# EAGLE board r4c_pcb_v1 (EAGLE 5.10)
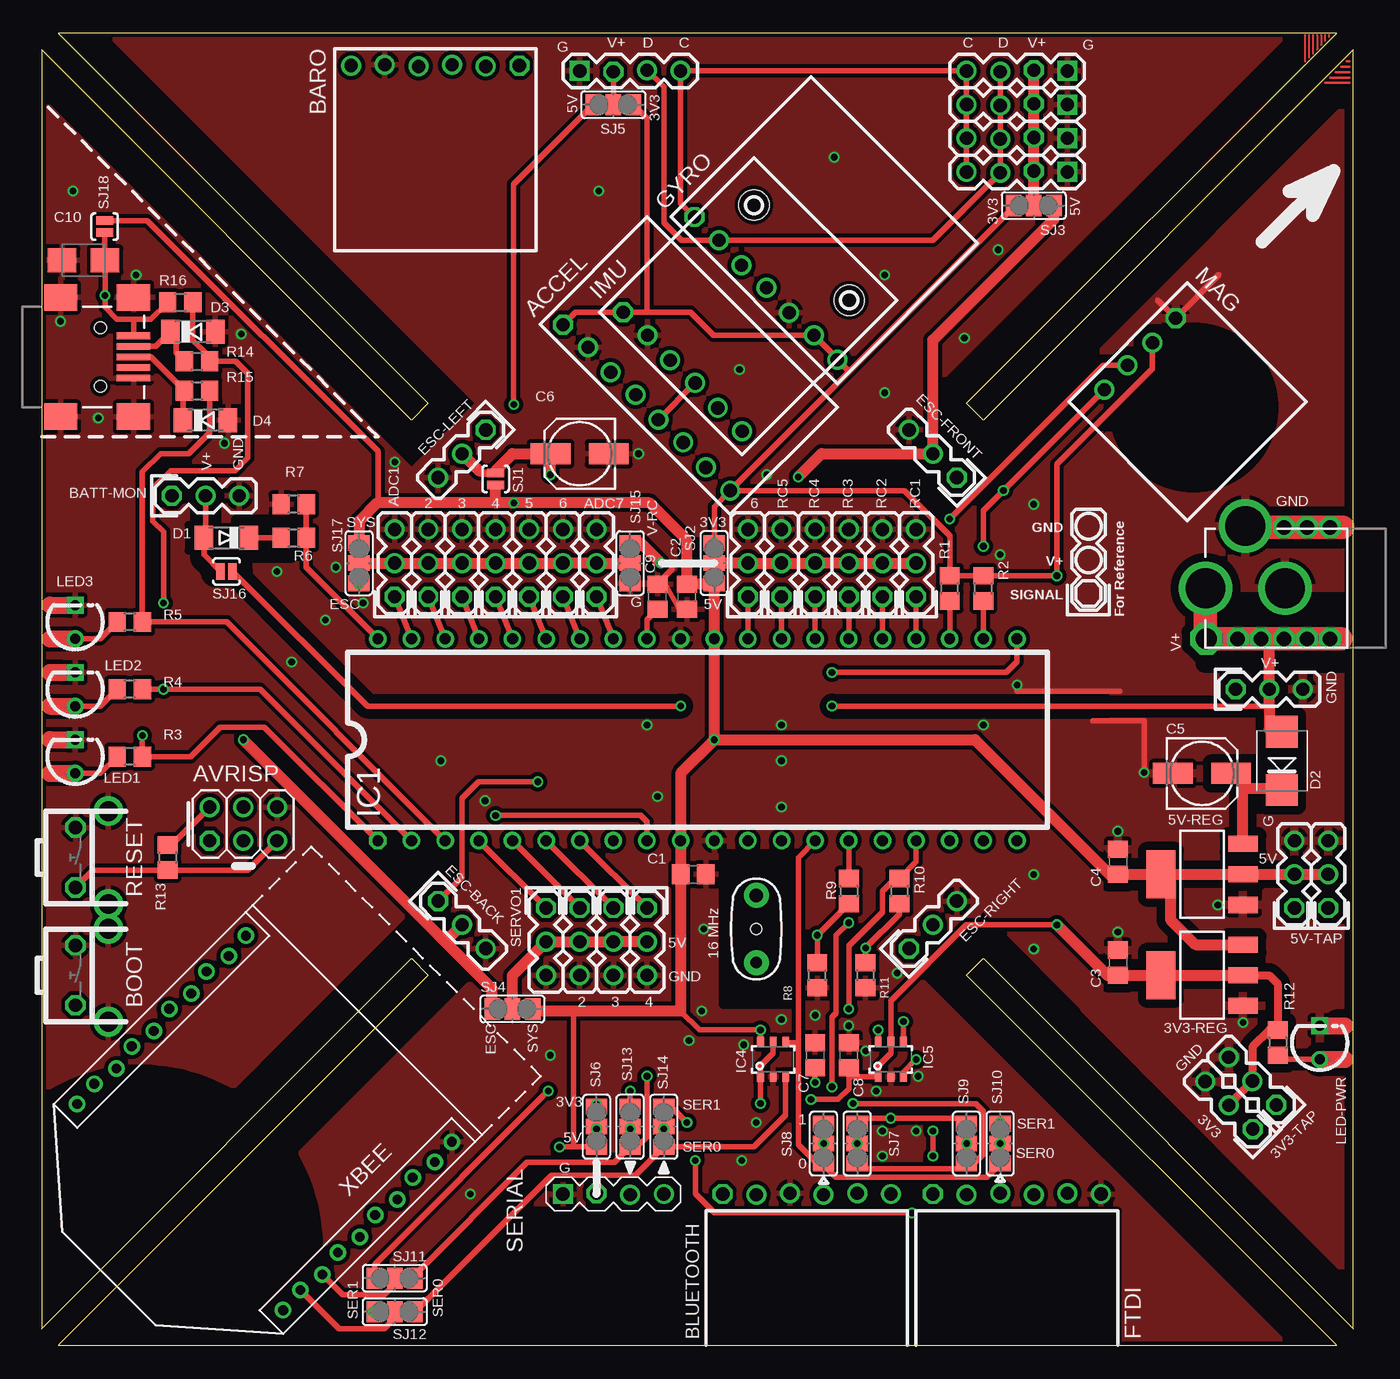
[diagram p0: board, top side]
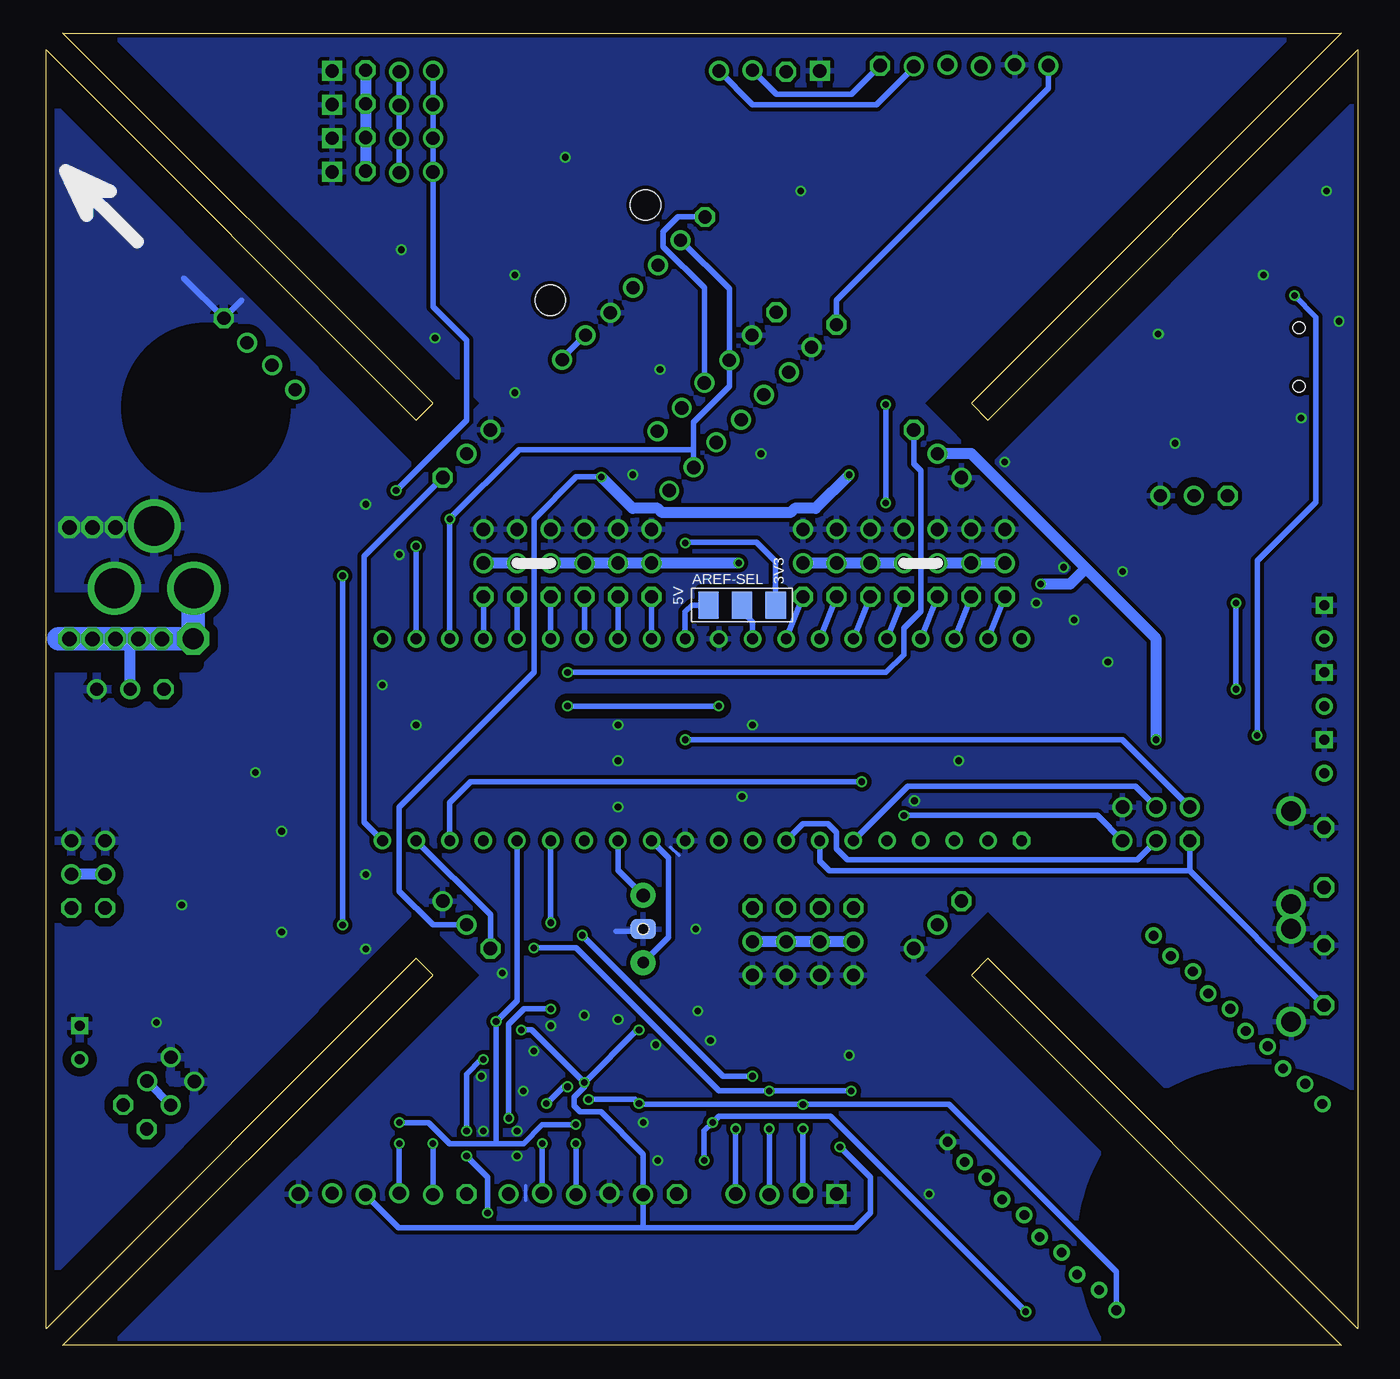
[diagram p1: board, bottom side, seen from below]

Size 99.06 x 99.06 mm. Coordinates in mm from the lower left corner, seen from the top.
Outline: 27.94,29.21 29.21,27.94 1.27,0 97.79,0 69.85,27.94 71.12,29.21 99.06,1.27 99.06,97.79 71.12,69.85 69.85,71.12 97.79,99.06 1.27,99.06 29.21,71.12 27.94,69.85 0,97.79 0,1.27 27.94,29.21
Copper layers (1*16): Top 0.035mm / dielectric 1.5mm / Bottom 0.035mm
Design rules "Fusion_eagle_rule_v1.1_TentedVias2 *": minimum track width 6mil, minimum drill 0.5mm, track to track 6mil, track to pad 6mil, pad to pad 6mil, via to via 6mil, smd to smd 0mil, copper to edge 10mil, drill to drill 10mil, minimum pad ring 10mil, minimum via ring 6mil, stop-mask expansion 2mil, vias tented up to drill 25mil, thermal gap 12mil
tKeepout: area 36.8,0 to 49.5,10.2
tRestrict: area 36.8,0 to 49.5,10.2; area 92.4,43.2 to 94.9,45.1; area 13,60.2 to 14.9,61.8; area 87.8,51.4 to 99.1,56.2; area 12.2,63.9 to 12.6,64.4; area 14.6,59.4 to 18.9,62.4; area 11.1,60 to 11.7,61.9; 13 lines
bRestrict: area 87.8,51.4 to 99.1,56.2; area 12.2,63.9 to 12.6,64.4; 1 lines

## Footprints (pad centres in the part's own frame; a part is rotated, then mirrored left to right if it is on the bottom)
SOT223 = smd 1.219 x 2.235: 1 -2.311,-3.099; 2 0,-3.099; 3 2.311,-3.099 | smd 3.6 x 2.2: 4 0,3.099
SERVO-3PIN = drill 1 octagon: 1 0,-2.54 | drill 1 round: 2 0,0; 3 0,2.54
BMA180-BOB = drill 1 octagon: 1 -8.89,-0.064 | drill 1 round: 2 -6.35,0.064; 3 -3.81,-0.064; 4 -1.27,0.064; 5 1.27,-0.064; 6 3.81,0.064; 7 6.35,-0.064; 8 8.89,0
SJ-FERRITE-BEAD = smd 1.524 x 2.032: 1 -2.54,0; 2 0,0; 3 2.54,0
2X3-NS = drill 1 octagon: 1 -2.54,-1.27 | drill 1 round: 2 -2.54,1.27; 3 0,-1.27; 4 0,1.27; 5 2.54,-1.27; 6 2.54,1.27
BMP085-BOB = drill 1 octagon: 1 -6.35,0 | drill 1 round: 2 -3.81,0.064; 3 -1.27,-0.064; 4 1.27,0.064; 5 3.81,-0.064; 6 6.35,0
BLUESMIRF-CONN = drill 1 octagon: 1 -6.35,0 | drill 1 round: 2 -3.81,-0.064; 3 -1.27,0.064; 4 1.27,-0.064; 5 3.81,0.064; 6 6.35,0
B3F-31XX = drill 1.016 octagon: 1 -2.261,-1.245; 2 2.261,-1.245 | drill 1.499 pad 2.159 round: S@3 -3.505,1.245; S@4 3.505,1.245
C0805 = smd 1.3 x 1.5: 1 -0.95,0; 2 0.95,0
153CLV-0505 = smd 3 x 1.6: + 2.2,0; - -2.2,0
B/3528-21W = smd 2.15 x 1.8: + 1.625,0; - -1.625,0
MINIMELF = smd 1.4 x 1.8: A 1.7,0; C -1.7,0
SMB = smd 2.4 x 2.4: A 2.2,0; C -2.2,0
SOD80C = smd 1.4 x 1.8: A 1.7,0; C -1.7,0
FTDI-CABLE-EDGE = drill 1 octagon: 1 -6.35,0 | drill 1 round: 2 -3.81,-0.064; 3 -1.27,0.064; 4 1.27,-0.064; 5 3.81,0.064; 6 6.35,0
ITG-3200-BOB = drill 1 octagon: 1 -7.62,0 | drill 1 round: 2 -5.08,0.064; 3 -2.54,-0.064; 4 0,0.064; 5 2.54,-0.064; 6 5.08,0.064; 7 7.62,0
DIL40 = drill 0.813 octagon: 1 -24.13,-7.62 | drill 0.813 round: 2 -21.59,-7.62; 3 -19.05,-7.62; 4 -16.51,-7.62; 5 -13.97,-7.62; 6 -11.43,-7.62; 7 -8.89,-7.62; 8 -6.35,-7.62; 9 -3.81,-7.62; 10 -1.27,-7.62; 11 1.27,-7.62; 12 3.81,-7.62; 13 6.35,-7.62; 14 8.89,-7.62; 15 11.43,-7.62; 16 13.97,-7.62; 17 16.51,-7.62; 18 19.05,-7.62; 19 21.59,-7.62; 20 24.13,-7.62; 21 24.13,7.62; 22 21.59,7.62; 23 19.05,7.62; 24 16.51,7.62; 25 13.97,7.62; 26 11.43,7.62; 27 8.89,7.62; 28 6.35,7.62; 29 3.81,7.62; 30 1.27,7.62; 31 -1.27,7.62; 32 -3.81,7.62; 33 -6.35,7.62; 34 -8.89,7.62; 35 -11.43,7.62; 36 -13.97,7.62; 37 -16.51,7.62; 38 -19.05,7.62; 39 -21.59,7.62; 40 -24.13,7.62
SOT-23-6 = smd 0.51 x 0.8: 1 -0.95,-1.3; 2 0,-1.3; 3 0.95,-1.3; 4 0.95,1.3; 5 0,1.3; 6 -0.95,1.3
6DOF_IMU = drill 1 octagon: 1 0,-6.35 | drill 1 round: 2 -0.064,-3.81; 3 0.064,-1.27; 4 -0.064,1.27; 5 0.064,3.81; 6 0,6.35 | hole 2.286: -12.7,5.08; -12.7,-5.08
POWER_JACK_PTH = drill 2.997 round: GND 0,7.7; GNDBREAK 4.7,10.7; PWR 0,13.7
LED3MM = drill 0.762 pad 1.27 round: A -1.27,0 | drill 0.762 pad 1.27 square: K 1.27,0
HMC5843-BOB = drill 1 octagon: 1 -3.81,0 | drill 1 round: 2 -1.27,0.064; 3 1.27,-0.064; 4 3.81,0
R0805 = smd 1.3 x 1.5: 1 -0.95,0; 2 0.95,0
SERIAL-CONN = drill 1 square: 1 -3.81,0 | drill 1 octagon: 2 -1.27,0.064 | drill 1 round: 3 1.27,-0.064; 4 3.81,0
SJ_2S-NO = smd 0.635 x 1.27: 1 -0.45,0; 2 0.45,0
SJ_2 = smd 1.168 x 1.6: 1 -1.524,0; 2 0,0; 3 1.524,0
USB-MINIB = smd 2.5 x 0.5: D+ 2.5,0; D- 2.5,0.8; GND 2.5,-1.6; ID 2.5,-0.8; VBUS 2.5,1.6 | smd 2.5 x 2: GND@1 -3,-4.5; GND@2 -3,4.5; GND@3 2.5,4.5; GND@4 2.5,-4.5 | hole 0.9: 0,2.2; 0,-2.2
I2C-GROUP = drill 1 square: 1 -3.81,0 | drill 1 octagon: 2 -1.27,-0.064 | drill 1 round: 3 1.27,0.064; 4 3.81,0
XBEE-1_LOCK = drill 0.737 round: 1 -10.987,20; 2 -10.822,18; 3 -11.178,16; 4 -10.822,14; 5 -11.178,12; 6 -10.822,10; 7 -11.178,8; 8 -10.822,6; 9 -11.178,4; 10 -11.013,2; 11 10.987,2; 12 10.822,4; 13 11.178,6; 14 10.822,8; 15 11.178,10; 16 10.822,12; 17 11.178,14; 18 10.822,16; 19 11.178,18; 20 11.013,20
RESONATOR-PTH = drill 1.016 pad 1.88 round: 1 -2.54,0 | smd 1.524 x 1.905 bottom: 2 0,0 | drill 0.864 pad 1.88 round: 3 2.54,0 | hole 0.825: 0,0

## Placement (x,y rotation side)
3V3-REG  [SOT223]  87.63,27.94 90 top
3V3-TAP  [SERVO-3PIN]  91.44,19.95 45 top
3V3-TAP1  [SERVO-3PIN]  89.66,18.13 45 top
5V-REG  [SOT223]  87.63,35.56 90 top
5V-TAP  [SERVO-3PIN]  94.61,35.56 0 top
5V-TAP1  [SERVO-3PIN]  97.16,35.56 0 top
ACCEL  BMA180-BOB  [BMA180-BOB]  45.72,70.81 315 top
ADC1  [SERVO-3PIN]  26.67,59.05 0 top
ADC2  [SERVO-3PIN]  29.21,59.05 0 top
ADC3  [SERVO-3PIN]  31.75,59.05 0 top
ADC4  [SERVO-3PIN]  34.29,59.05 0 top
ADC5  [SERVO-3PIN]  36.83,59.05 0 top
ADC6  [SERVO-3PIN]  39.37,59.05 0 top
ADC7  [SERVO-3PIN]  41.91,59.05 0 top
AREF-SEL  [SJ-FERRITE-BEAD]  46.51,55.88 180 bottom
AVRISP  [2X3-NS]  15.24,39.37 0 top
BARO  BMP085-BOB  [BMP085-BOB]  29.74,96.61 180 top
BATT  [SERVO-3PIN]  92.71,49.53 270 top
BATT-MON  [SERVO-3PIN]  12.38,64.14 270 top
BLUETOOTH  [BLUESMIRF-CONN]  57.78,11.43 0 top
BOOT  [B3F-31XX]  3.81,27.94 270 top
C1  0.1u  [C0805]  49.21,35.56 0 top
C2  0.1u  [C0805]  48.74,56.52 270 top
C3  1u  [C0805]  81.28,28.89 90 top
C4  1u  [C0805]  81.28,36.51 90 top
C5  33u  [153CLV-0505]  87.63,43.18 0 top
C6  33u  [153CLV-0505]  40.64,67.31 180 top
C7  0.1u  [C0805]  58.42,21.91 90 top
C8  0.1u  [C0805]  60.96,21.91 90 top
C9  0.1u  [C0805]  46.51,56.52 90 top
C10  4u7  [B/3528-21W]  3.17,81.92 0 top
D1  [MINIMELF]  13.97,60.96 180 top
D2  [SMB]  93.66,44.13 90 top
D3  3V6  [SOD80C]  11.43,76.52 0 top
D4  3V6  [SOD80C]  12.38,69.85 0 top
ESC-BACK  [SERVO-3PIN]  31.75,31.75 225 top
ESC-FRONT  [SERVO-3PIN]  67.31,67.31 45 top
ESC-LEFT  [SERVO-3PIN]  31.75,67.31 135 top
ESC-RIGHT  [SERVO-3PIN]  67.31,31.75 315 top
FTDI  [FTDI-CABLE-EDGE]  73.66,11.43 0 top
GYRO  IDG-3200-BOB  [ITG-3200-BOB]  54.7,79.79 315 top
IC1  ATMEGA644PA-20PU  [DIL40]  49.53,45.72 0 top
IC4  TXB0101 SOT-23-6  [SOT-23-6]  55.24,21.59 0 top
IC5  TXB0101 SOT-23-6  [SOT-23-6]  64.14,21.59 0 top
IMU  6DOF_IMU  [6DOF_IMU]  48.41,73.51 225 top
J1  BATTERY  [POWER_JACK_PTH]  101.6,57.15 90 top
LED1  [LED3MM]  2.54,44.45 90 top
LED2  [LED3MM]  2.54,49.53 90 top
LED3  [LED3MM]  2.54,54.61 90 top
LED-PWR  [LED3MM]  96.52,22.86 90 top
MAG  HMC5843-BOB  [HMC5843-BOB]  82.95,74.84 225 top
R1  4K7  [R0805]  68.58,57.15 90 top
R2  4K7  [R0805]  71.12,57.15 90 top
R3  1K  [R0805]  6.67,44.45 180 top
R4  1K  [R0805]  6.67,49.53 180 top
R5  1K  [R0805]  6.67,54.61 180 top
R6  15K  [R0805]  19.05,60.96 0 top
R7  7K5  [R0805]  19.05,63.5 180 top
R8  10K  [R0805]  58.58,27.94 90 top
R9  4K7  [R0805]  60.96,34.29 270 top
R10  4K7  [R0805]  64.77,34.29 270 top
R11  10K  [R0805]  62.23,27.94 90 top
R12  1K  [R0805]  93.34,22.86 270 top
R13  10K  [R0805]  9.53,36.83 270 top
R14  68R  [R0805]  11.75,74.3 0 top
R15  68R  [R0805]  11.75,72.07 0 top
R16  2K2  [R0805]  10.48,78.74 0 top
RC1  [SERVO-3PIN]  66.04,59.05 0 top
RC2  [SERVO-3PIN]  63.5,59.05 0 top
RC3  [SERVO-3PIN]  60.96,59.05 0 top
RC4  [SERVO-3PIN]  58.42,59.05 0 top
RC5  [SERVO-3PIN]  55.88,59.05 0 top
RC6  [SERVO-3PIN]  53.34,59.05 0 top
RESET  [B3F-31XX]  3.81,36.83 270 top
SERIAL  SERIAL  [SERIAL-CONN]  43.18,11.43 0 top
SERVO1  [SERVO-3PIN]  38.1,30.48 180 top
SERVO2  [SERVO-3PIN]  40.64,30.48 180 top
SERVO3  [SERVO-3PIN]  43.18,30.48 180 top
SERVO4  [SERVO-3PIN]  45.72,30.48 180 top
SJ1  SOLDERJUMPERNO  [SJ_2S-NO]  34.29,65.41 270 top
SJ2  [SJ_2]  50.8,59.05 90 top
SJ3  [SJ_2]  74.93,86.04 180 top
SJ4  [SJ_2]  35.56,25.4 0 top
SJ5  [SJ_2]  43.18,93.66 0 top
SJ6  [SJ_2]  41.91,16.51 90 top
SJ7  [SJ_2]  61.59,15.24 90 top
SJ8  [SJ_2]  59.05,15.24 90 top
SJ9  [SJ_2]  69.85,15.24 90 top
SJ10  [SJ_2]  72.39,15.24 90 top
SJ11  [SJ_2]  26.67,5.08 180 top
SJ12  [SJ_2]  26.67,2.54 180 top
SJ13  [SJ_2]  44.45,16.51 90 top
SJ14  [SJ_2]  46.99,16.51 90 top
SJ15  [SJ_2]  44.45,59.05 270 top
SJ16  SOLDERJUMPERNO  [SJ_2S-NO]  13.97,58.42 0 top
SJ17  [SJ_2]  23.97,59.05 270 top
SJ18  SOLDERJUMPERNO  [SJ_2S-NO]  4.76,84.45 90 top
U$2  [SERVO-3PIN-REFERENCE]  79.06,59.29 90 top
U$3  [ARROR-DIR-REFERENCE]  93.98,85.09 315 top
U$4  [ARROR-DIR-REFERENCE]  93.98,85.09 45 bottom
U$5  USB-MINIB-WSHIELD  [USB-MINIB]  4.45,74.61 0 top
X14  I2C-GROUP  [I2C-GROUP]  73.66,96.2 180 top
X15  I2C-GROUP  [I2C-GROUP]  73.66,93.66 180 top
X16  I2C-GROUP  [I2C-GROUP]  73.66,91.12 180 top
X17  I2C-GROUP  [I2C-GROUP]  73.66,88.58 180 top
X18  I2C  [I2C-GROUP]  44.45,96.2 0 top
XBEE  [XBEE-1_LOCK]  24.62,24.57 135 top
Y1  16 MHz  [RESONATOR-PTH]  53.98,31.43 270 top

## Library data of the parts
3V3-REG 3V3-TAP 3V3-TAP1 5V-REG 5V-TAP 5V-TAP1 ACCEL ADC1-ADC7 AREF-SEL AVRISP BARO BATT BATT-MON BLUETOOTH BOOT ESC-BACK ESC-FRONT ESC-LEFT ESC-RIGHT FTDI GYRO IC1 IC4 IC5 IMU J1 LED1-LED3 LED-PWR MAG RC1-RC6 RESET SERIAL SERVO1-SERVO4 SJ1-SJ18 U$2-U$5 X14-X18 XBEE Y1 = aq_pcb_v2
C1-C10 R1-R16 = rcl
D1-D4 = diode

## Nets
5V-ESC: C6.+ ESC-BACK.2 ESC-FRONT.2 ESC-LEFT.2 ESC-RIGHT.2 SJ1.1 SJ3.1 SJ4.1 SJ17.3
+3V3: 3V3-REG.2 3V3-REG.4 3V3-TAP1.2 3V3-TAP.2 ACCEL.1 ACCEL.8 AREF-SEL.1 BARO.6 C3.1 C8.1 GYRO.6 GYRO.7 IC4.1 IC4.5 IC5.1 IC5.5 IMU.1 MAG.2 R1.2 R2.2 R12.1 SJ2.3 SJ3.3 SJ5.3 SJ6.3 XBEE.1
+5V: 3V3-REG.3 5V-REG.2 5V-REG.4 5V-TAP1.2 5V-TAP.2 AREF-SEL.3 AVRISP.2 BLUETOOTH.2 C1.1 C2.1 C4.1 C7.1 FTDI.4 IC1.10 IC1.30 IC4.6 IC5.6 R13.1 SJ1.2 SJ2.1 SJ4.3 SJ5.1 SJ6.1 SJ17.1 SJ18.2
+12V: BATT.2 D2.A J1.PWR SJ16.2
ADC1: ADC1.1 IC1.39
ADC2: ADC2.1 IC1.38
ADC3: ADC3.1 IC1.37
ADC4: ADC4.1 IC1.36
ADC5: ADC5.1 IC1.35
ADC6: ADC6.1 IC1.34
ADC7: ADC7.1 IC1.33
ESC-BACK: ESC-BACK.1 IC1.18
ESC-FRONT: ESC-FRONT.1 IC1.20
ESC-LEFT: ESC-LEFT.1 IC1.21
ESC-RIGHT: ESC-RIGHT.1 IC1.19
GND: 3V3-REG.1 3V3-TAP1.3 3V3-TAP.3 5V-REG.1 5V-TAP1.3 5V-TAP.3 ACCEL.2 ADC1.3 ADC2.3 ADC3.3 ADC4.3 ADC5.3 ADC6.3 ADC7.3 AVRISP.6 BARO.5 BATT-MON.3 BATT.3 BLUETOOTH.3 BOOT.1 BOOT.S@3 BOOT.S@4 C1.2 C2.2 C3.2 C4.2 C5.- C6.- C7.2 C8.2 C9.2 C10.- D3.A D4.A ESC-BACK.3 ESC-FRONT.3 ESC-LEFT.3 ESC-RIGHT.3 FTDI.6 GYRO.5 IC1.11 IC1.31 IC4.2 IC5.2 IMU.2 J1.GND J1.GNDBREAK LED1.K LED2.K LED3.K LED-PWR.K MAG.1 R7.2 R8.1 R11.1 RC1.3 RC2.3 RC3.3 RC4.3 RC5.3 RC6.3 RESET.1 RESET.S@3 RESET.S@4 SERIAL.1 SERVO1.3 SERVO2.3 SERVO3.3 SERVO4.3 SJ15.3 U$5.GND U$5.GND@1 U$5.GND@2 U$5.GND@3 U$5.GND@4 X14.1 X15.1 X16.1 X17.1 X18.1 XBEE.10 Y1.2
MISO: AVRISP.1 BOOT.2 IC1.7 SERVO4.1
MOSI: AVRISP.4 IC1.6 SERVO3.1
N$1: IC1.12 Y1.3
N$2: IC1.13 Y1.1
N$3: LED3.A R5.2
N$4: LED2.A R4.2
N$5: LED1.A R3.2
N$6: SJ3.2 X14.2 X15.2 X16.2 X17.2
N$8: RC1.2 RC2.2 RC3.2 RC4.2 RC5.2 RC6.2 SJ2.2 SJ15.1
N$11: IC1.40 R6.2 R7.1
N$12: SJ5.2 X18.2
N$13: D1.C R6.1
N$14: BATT-MON.2 D1.A SJ16.1
N$15: SERIAL.2 SJ6.2
N$16: 5V-REG.3 C5.+ D2.C
N$17: BLUETOOTH.5 SJ7.2
N$18: BLUETOOTH.4 SJ8.2
N$19: FTDI.2 SJ9.2
N$20: SERVO1.2 SERVO2.2 SERVO3.2 SERVO4.2 SJ4.2
N$21: FTDI.3 SJ10.2
N$22: SJ12.2 XBEE.2
N$23: SJ11.2 XBEE.3
N$24: LED-PWR.A R12.2
N$25: AREF-SEL.2 C9.1 IC1.32
N$31: SERIAL.3 SJ13.2
N$32: SERIAL.4 SJ14.2
N$34: ADC1.2 ADC2.2 ADC3.2 ADC4.2 ADC5.2 ADC6.2 ADC7.2 SJ15.2 SJ17.2
N$42: D3.C R14.1 U$5.D-
N$43: D4.C R15.1 U$5.D+
RC-IN-1: IC1.24 RC1.1
RC-IN-2: IC1.25 RC2.1
RC-IN-3: IC1.26 RC3.1
RC-IN-4: IC1.27 RC4.1
RC-IN-5: IC1.28 RC5.1
RC-IN-6: IC1.29 RC6.1
RESET: AVRISP.5 IC1.9 R13.2 RESET.2
RX0-HV: IC1.14 IC4.4 SJ8.1 SJ10.1
RX0-LV: IC4.3 SJ12.1 SJ14.1
RX1-HV: IC1.16 IC5.4 SJ8.3 SJ10.3
RX1-LV: IC5.3 SJ12.3 SJ14.3
SCK: AVRISP.3 IC1.8
SCL: ACCEL.5 BARO.2 GYRO.1 IC1.22 IMU.4 MAG.4 R2.1 X14.4 X15.4 X16.4 X17.4 X18.4
SDA: ACCEL.7 BARO.1 GYRO.2 IC1.23 IMU.3 MAG.3 R1.1 X14.3 X15.3 X16.3 X17.3 X18.3
SERVO1: IC1.4 SERVO1.1
SERVO2: IC1.5 SERVO2.1
TX0-HV: IC1.15 R9.1 SJ7.1 SJ9.1
TX0-LV: R8.2 R9.2 SJ11.1 SJ13.1
TX1-HV: IC1.17 R10.1 SJ7.3 SJ9.3
TX1-LV: R10.2 R11.2 SJ11.3 SJ13.3
USBD+: IC1.3 R5.1 R15.2
USBD-: IC1.2 R4.1 R14.2 R16.2
USBPWR: C10.+ IC1.1 R3.1 R16.1 SJ18.1 U$5.VBUS

## Tracks (layer width: path | path; a pad name or v marks a point on that pad's centre or on a via)
5V-ESC  (via drill 0.5)
  Top 0.406: C6.+ 38.42,67.29 | SJ1.1 34.29,66.04
  Top 0.61: 33.05,66.01 33.18,65.88 SJ1.1
  Top 0.813: ESC-LEFT.2 33.05,66.01 | SJ4.1 34.04,26.92 30.48,30.48 | SJ3.1 76.45,85.03 67.31,75.88 ESC-FRONT.2 58.9,67.31 v57.15,65.56 | 38.42,67.29 v38.42,65.72 | 30.48,30.48 v15.24,45.72 | 30.48,30.48 ESC-BACK.2 | C6.+ 35.56,67.31 34.29,66.04 | SJ17.3 | v23.97,57.47 SJ17.3
  Bottom 0.406: ESC-RIGHT.2 69.85,31.75 72.39,34.29 72.39,40.64 62.23,50.8 62.23,62.38 59.04,65.56 v57.15,65.56
  Bottom 0.813: v15.24,45.72 15.24,53.34 20.56,58.66 | 20.56,58.66 29.21,67.31 ESC-LEFT.2 | v38.42,65.72 40.96,63.18 42.55,63.18 42.86,62.87 52.55,62.87 52.86,63.18 54.77,63.18 v57.15,65.56 | v23.97,57.47 21.75,57.47 20.56,58.66
+3V3  (via drill 0.5)
  Top 0.406: R1.2 R2.2 v76.68,58.1 76.68,66.52 83.89,73.73 MAG.2 | ACCEL.8 50.8,63.32 SJ2.3 | 60.96,20.29 IC5.1 63.19,21.12 64.14,22.07 IC5.5 64.14,26.04 69.85,31.75 v76.68,31.75 | 60.96,20.29 C8.1 | IC4.5 55.24,22.07 54.29,21.11 IC4.1 v54.29,18.26 | v58.1,18.57 60.15,18.57 60.96,19.38 60.96,20.29 | ACCEL.1 40.33,78 IMU.1 45.72,78 | 45.72,78 49,78 50.76,76.25 GYRO.6 60.09,74.49 GYRO.7 60.92,73.57 61.05,73.57 | SJ5.3 45.72,92.65 45.72,78 | 68.74,58.1 68.58,58.26 R1.2 | ACCEL.8 65.17,64.53 68.58,61.12 R1.2 | SJ3.3 73.41,85.93 61.05,73.57 | ACCEL.8 61.05,73.57 | v41.91,18.19 SJ6.3
  Top 0.61: 3V3-REG.2 92.71,27.94 93.34,27.3 R12.1 92.71,23.81 91.44,22.54 3V3-TAP.2 89.66,18.18 3V3-TAP1.2
  Top 0.813: 3V3-REG.2 3V3-REG.4 C3.1 80.48,27.94 v76.68,31.75
  Bottom 0.406: XBEE.1 18.25,5.54 30.89,18.19 v41.91,18.19 54.23,18.19 v54.29,18.26 54.61,18.57 v58.1,18.57 | v76.68,31.75 v76.68,58.1 | SJ2.3 50.74,60.64 45.44,60.64 43.97,59.18 AREF-SEL.1 | BARO.6 23.39,94.88 39.39,78.88 ACCEL.1 | 60.48,74.14 58.42,76.2 58.38,76.25 GYRO.6
  Bottom 0.61: 3V3-TAP.2 91.44,19.92 89.61,18.1
  other vias: 50.8,60.58
+5V  (via drill 0.5)
  Top 0.406: v58.42,19.84 C7.1 | IC4.6 v54.29,23.81 49.69,23.81 48.26,25.24 | IC5.6 63.19,23.65 v63.18,23.81 | v39.12,14.99 SJ6.1 | 80.8,35.4 C4.1 | 37.15,25.24 37.15,25.34 SJ4.3 | 34.29,64.77 SJ1.2 | v35.65,71.03 35.65,87.66 SJ5.1 | 40.16,25.24 40.16,15.08 | AVRISP.2 10,37.94 R13.1 | 25.4,63.59 25.4,67.48 7.97,84.91 SJ18.2
  Top 0.813: C4.1 5V-REG.4 85.25,35.56 | 85.25,35.56 5V-REG.2 5V-TAP.2 5V-TAP1.2 | v50.8,45.72 48.26,43.18 IC1.10 C1.1 48.26,25.24 40.16,25.24 37.15,25.24 | v50.8,45.72 IC1.30 SJ2.1 50.8,57.47 C2.1 48.74,60.78 45.92,63.59 v35.65,63.59 | v50.8,45.72 70.48,45.72 80.8,35.4 | v35.65,63.59 35.47,63.59 | SJ17.1 | SJ17.1 23.97,62.23 25.33,63.59 25.4,63.59 34.29,63.59 | v35.65,63.59 34.29,63.59 | 34.29,63.59 34.29,64.77 | 3V3-REG.3 87.14,30.25 85.25,32.14 85.25,35.56
  Bottom 0.406: AVRISP.2 17.78,45.72 v50.8,45.72 | v39.12,14.99 36.83,12.7 36.83,10.01 37.95,8.89 53.98,8.89 | FTDI.4 72.45,8.89 53.98,8.89 | 53.98,8.89 BLUETOOTH.2 53.98,14.45 57.15,17.62 | v58.42,19.84 54.45,23.81 v54.29,23.81 | v63.18,23.81 62.39,23.81 v58.42,19.84 | v58.42,19.84 58.42,19.53 59.21,18.73 59.21,18.1 58.74,17.62 57.15,17.62 | 57.15,17.62 | v35.65,63.59 v35.65,71.03 | IC1.30 50.8,55.38 50.3,55.88 AREF-SEL.3
  Bottom 0.813: 5V-TAP.2 5V-TAP1.2
+12V  (via drill 0.5, 1.1, 1.6)
  Top 0.406: SJ16.2 14.45,58.42 24.61,48.26 v48.26,48.26 | v59.69,48.26 92.71,48.26
  Top 0.813: D2.A 92.71,46.51 92.71,48.26 BATT.2 92.71,53.34
  Top 1.778: J1.PWR 87.9,53.34 v90.33,53.34 | 98.11,53.34 v97.31,53.34 v95.57,53.34 v93.82,53.34 92.71,53.34 v92.08,53.34 v90.33,53.34 | v90.33,53.34 v87.95,53.34
  Bottom 0.406: v48.26,48.26 v59.69,48.26
  Bottom 0.813: v93.82,53.34 92.71,53.34 BATT.2
  Bottom 1.778: 87.95,57.15 v87.95,53.34 98.11,53.34
ADC1
  Top 0.406: IC1.39 ADC1.1
  Bottom 0.406: IC1.39 ADC1.1
ADC2
  Top 0.406: IC1.38 ADC2.1
  Bottom 0.406: IC1.38 ADC2.1
ADC3
  Top 0.406: IC1.37 ADC3.1
  Bottom 0.406: IC1.37 ADC3.1
ADC4
  Top 0.406: IC1.36 ADC4.1
  Bottom 0.406: IC1.36 ADC4.1
ADC5
  Top 0.406: IC1.35 ADC5.1
  Bottom 0.406: IC1.35 ADC5.1
ADC6
  Top 0.406: IC1.34 ADC6.1
  Bottom 0.406: IC1.34 ADC6.1
ADC7
  Top 0.406: IC1.33 ADC7.1
  Bottom 0.406: IC1.33 ADC7.1
ESC-BACK  (via drill 0.5)
  Top 0.406: ESC-BACK.1 31.75,35.34 31.75,41.3 32.99,42.55 v37.47,42.55
  Bottom 0.406: v37.47,42.55 66.99,42.55 68.58,40.96 IC1.18
ESC-FRONT
  Bottom 0.406: IC1.20 75.05,39.49 75.05,59.57 ESC-FRONT.1
ESC-LEFT  (via drill 0.5)
  Top 0.406: v59.69,50.8 72.87,50.8 73.66,51.59 IC1.21
  Bottom 0.406: ESC-LEFT.1 33.55,66.57 33.02,66.04 33.02,55.4 34.29,54.13 34.29,52.15 35.64,50.8 v59.69,50.8
ESC-RIGHT
  Bottom 0.406: 65.56,30 ESC-RIGHT.1 65.51,32.49 IC1.19
GND  (via drill 0.5, 1.1)
  Top 0.406: 85.72,77.47 84.38,78.82 84.3,78.82 84.3,78.9 | 85.65,77.55 88.9,80.8 | 48.26,55.4 46.99,57.63 46.83,57.47 C9.2 | 46.83,57.78 47.62,58.58 | 81.44,49.37 73.66,49.37 v73.66,49.85 | 79.38,47.15 83.26,47.15 v83.26,43.26
  Top 1.27: 0.64,55.88 LED3.K | 0.64,50.8 LED2.K | 0.64,45.72 LED1.K | LED-PWR.K 98.42,24.13
  Top 1.778: 90.81,61.75 v93.82,61.75 v95.57,61.75 v97.31,61.75 98.27,61.75
  Bottom 0.254: 62.87,10.95 62.87,12.06 | 51.28,36.99 51.91,37.62
  Bottom 0.406: Y1.2 53.98,31.27 56.04,31.27 | 84.3,78.9 85.64,77.55 MAG.1 | MAG.1 88.66,80.57 | MAG.1 85.57,77.47
  other vias: 33.5,41.12 53.98,16.83 52.86,13.97 38.42,21.91 66.2,20.32 64.61,28.1 58.42,24.92 60.96,24.13 55.88,24.61 63.02,19.21 62.23,22.23 81.28,38.81 81.28,31.19 71.12,46.83 55.88,46.83 45.72,46.83 30.16,44.13 18.89,51.59 59.85,89.69 55.88,44.13 55.88,40.64 46.51,41.43 90.73,24.37 88.82,33.26 53.02,22.7 48.9,23.02 74.93,63.5 72.39,59.69 66.04,16.19 63.5,16.19 63.5,14.29 63.66,80.8 63.66,71.91 72.23,82.71 42.07,87.15 45.09,67.31 52.71,73.66 54.77,65.72 17.78,58.42 24.29,56.04 22.23,58.74 26.67,66.67 74.93,35.56 49.85,25.24 50.01,31.43 32.39,11.43 21.43,54.77 74.93,29.92 1.43,77.31 7.14,80.8 4.29,70.01 15.08,76.36 13.81,68.1 2.38,87.15 69.69,76.04
  pour Top (isolate 0.305): 5.08,99.06 93.98,99.06 66.04,71.12 71.12,66.04 80.01,74.93 80.01,24.13 71.12,33.02 66.04,27.94 93.98,0 5.08,0 33.02,27.94 27.94,33.02 0,5.08 0,93.98 27.94,66.04 33.02,71.12
  pour Bottom (isolate 0.305): 5.08,99.06 93.98,99.06 66.04,71.12 71.12,66.04 80.01,74.93 80.01,24.13 71.12,33.02 66.04,27.94 93.98,0 5.08,0 33.02,27.94 27.94,33.02 0,5.08 0,93.98 27.94,66.04 33.02,71.12
  pour Bottom (isolate 0.635): 78.74,25.4 99.06,5.08 99.06,93.98 78.74,73.66
  pour Top (isolate 0.635): 78.74,25.4 99.06,5.08 99.06,93.98 78.74,73.66
MISO
  Top 0.406: IC1.7 SERVO4.1
  Bottom 0.406: BOOT.2 12.7,35.81 | 12.7,35.81 AVRISP.1 | 12.7,35.81 39.92,35.81 40.64,36.53 IC1.7
MOSI
  Top 0.406: IC1.6 SERVO3.1
  Bottom 0.406: AVRISP.4 16.83,42.23 33.97,42.23 IC1.6
N$1
  Bottom 0.406: Y1.3 52.07,30.8 52.07,36.83 IC1.12
N$2
  Bottom 0.406: Y1.1 55.88,35.88 IC1.13
N$3
  Top 0.406: LED3.A 4.45,53.34 R5.2
  Top 1.27: 0.64,53.34 LED3.A
N$4
  Top 0.406: LED2.A 4.45,48.26 R4.2
  Top 1.27: 0.64,48.26 LED2.A
N$5
  Top 0.406: LED1.A 4.45,43.18 R3.2
  Top 1.27: 0.64,43.18 LED1.A
N$6
  Top 0.813: X14.2 X15.2 X16.2 X17.2 SJ3.2
  Bottom 0.406: X14.2 74.93,96.2
  Bottom 0.813: 74.93,96.2 74.93,88.58
N$8  (via drill 0.5)
  Top 0.406: SJ15.1 45.24,60.58
  Top 0.813: RC1.2 RC2.2 RC3.2 RC4.2 RC5.2 RC6.2 SJ2.2 | 45.24,60.58 v46.77,59.05
  Bottom 0.813: v46.77,59.05 RC6.2 RC3.2 | RC2.2 RC1.2
N$11
  Top 0.406: IC1.40 20,58.74 R6.2 R7.1
N$12
  Top 0.406: SJ5.2 X18.2
N$13
  Top 0.406: D1.C R6.1
N$14
  Top 0.406: BATT-MON.2 12.38,61.07 D1.A 12.27,59.67 SJ16.1
N$15  (via drill 0.5)
  Top 0.406: v41.91,16.35 SJ6.2
  Bottom 0.406: SERIAL.2 v41.91,16.35
N$16
  Top 0.406: 90.73,43.18 C5.+ | 92.71,42.07 D2.C
  Top 0.813: 5V-REG.3 90.73,43.18 | C5.+ 90.65,43.02 90.81,43.02 90.81,42.07 92.71,42.07
N$17  (via drill 0.5)
  Bottom 0.406: BLUETOOTH.5 SJ7.2
  other vias: 61.59,15.24
N$18  (via drill 0.5)
  Bottom 0.406: BLUETOOTH.4 SJ8.2
  other vias: 59.05,15.24
N$19  (via drill 0.5)
  Bottom 0.406: FTDI.2 SJ9.2
  other vias: 69.85,15.24
N$20
  Top 0.813: SJ4.2 35.56,27.94 SERVO1.2 SERVO2.2 SERVO3.2 SERVO4.2
  Bottom 0.813: SERVO1.2 SERVO4.2
N$21  (via drill 0.5)
  Bottom 0.406: FTDI.3 SJ10.2
  other vias: 72.39,15.24
N$22
  Top 0.406: SJ12.2 26.67,2.06 25.88,1.27 22.46,1.27 XBEE.2
N$23
  Top 0.406: SJ11.2 26.67,4.6 25.88,3.81 22.75,3.81 XBEE.3
N$24
  Top 0.406: R12.2 93.34,21.59 LED-PWR.A
  Top 1.27: LED-PWR.A 98.42,21.59
N$25
  Top 0.406: C9.1 45.72,54.77 IC1.32
  Bottom 0.406: AREF-SEL.2 46.35,55.88 46.35,55.24 45.72,54.61 IC1.32
N$26
  Top 0.152: 96.93,98.45 96.93,98.91
N$27
  Top 0.152: 96.32,98.91 96.32,97.84
N$28
  Top 0.152: 96.62,98.91 96.62,98.15
N$29
  Top 0.152: 96.01,98.91 96.01,97.54
N$30
  Top 0.152: 95.4,98.91 95.4,96.93
N$31  (via drill 0.5)
  Top 0.406: v44.45,16.35 SJ13.2
  Bottom 0.406: SERIAL.3 v44.45,16.35
N$32  (via drill 0.5)
  Top 0.406: v46.99,16.35 SJ14.2
  Bottom 0.406: SERIAL.4 v46.99,16.35
N$33
  Top 0.152: 95.71,98.91 95.71,97.23
N$34
  Top 0.813: SJ15.2 ADC7.2 ADC6.2 ADC5.2 ADC4.2 ADC3.2 ADC2.2 ADC1.2 SJ17.2
  Bottom 0.813: ADC1.2 ADC3.2 | ADC4.2 ADC7.2
N$35
  Top 0.203: 96.93,95.3 98.75,95.3
N$36
  Top 0.152: 97.23,98.75 97.23,98.91
N$37
  Top 0.203: 97.33,95.71 98.75,95.71
N$38
  Top 0.203: 98.15,96.52 98.75,96.52
N$39
  Top 0.203: 97.74,96.11 98.75,96.11
N$40
  Top 0.203: 98.55,96.93 98.75,96.93
N$42
  Top 0.406: U$5.D- 8.62,75.41 D3.C 10.16,76.52 10.16,74.93 R14.1
N$43
  Top 0.406: U$5.D+ 8.26,74.61 9.21,73.66 R15.1 10.68,71.96 D4.C
RC-IN-1
  Top 0.406: IC1.24 RC1.1
  Bottom 0.406: IC1.24 RC1.1
RC-IN-2
  Top 0.406: IC1.25 RC2.1
  Bottom 0.406: IC1.25 RC2.1
RC-IN-3
  Top 0.406: IC1.26 RC3.1
  Bottom 0.406: IC1.26 RC3.1
RC-IN-4
  Top 0.406: IC1.27 RC4.1
  Bottom 0.406: IC1.27 RC4.1
RC-IN-5
  Top 0.406: IC1.28 RC5.1
  Bottom 0.406: IC1.28 RC5.1
RC-IN-6
  Top 0.406: IC1.29 RC6.1
  Bottom 0.406: IC1.29 RC6.1
RESET  (via drill 0.5)
  Top 0.406: v34.29,40.01 45.24,40.01 45.72,39.53 IC1.9 | RESET.2 3.88,35.88 R13.2 15.56,35.88 AVRISP.5
  Bottom 0.406: AVRISP.5 19.68,40.01 v34.29,40.01
RX0-HV
  Top 0.406: 57.15,22.86 57.15,36.83 IC1.14 | SJ10.1 71.37,12.7 60.01,12.7 59.05,13.65 SJ8.1 58.58,13.72 57.15,15.15 57.15,22.86 | IC4.4 56.23,22.86 57.15,22.86
RX0-LV
  Top 0.406: IC4.3 56.2,17.37 53.81,14.99 SJ14.1 44.86,12.86 38.51,12.86 SJ12.1
RX1-HV  (via drill 0.5)
  Top 0.406: IC5.4 v65.09,24.45 | SJ8.3 v59.05,16.67 | v72.39,16.83 SJ10.3
  Bottom 0.406: IC1.16 63.5,26.04 v65.09,24.45 65.09,15.24 | v59.05,16.67 61.59,16.67 63.02,15.24 65.09,15.24 | v72.39,16.83 70.17,16.83 68.58,15.24 65.25,15.24 65.09,15.24
RX1-LV  (via drill 0.5)
  Top 0.406: SJ12.3 v25.08,2.54 | v48.74,16.83 47.53,18.03 SJ14.3 | IC5.3 65.08,20.64 v66.04,21.59 | v67.31,14.29 v67.31,16.19 | v49.37,13.97 49.37,11.46 50.84,10 v65.72,10
  Bottom 0.406: v25.08,2.54 | v25.08,2.54 39.85,17.3 47.78,17.3 48.26,17.3 v48.74,16.83 49.37,16.19 v49.37,13.97 | v66.04,21.59 66.2,21.59 67.31,20.48 v67.31,16.19 | v67.31,14.29 65.72,12.7 v65.72,10
SCK
  Bottom 0.406: AVRISP.3 16.67,36.67 38.56,36.67 39.37,37.48 39.37,38.73 40.01,39.37 41.91,39.37 IC1.8
SCL  (via drill 0.5)
  Top 0.406: X17.4 X16.4 X15.4 X14.4 X18.4 48.26,86.23 GYRO.1 | IC1.22 R2.1 | v71.12,60.33 71.12,63.01 v72.63,64.53 MAG.4 | ACCEL.5 IMU.4
  Bottom 0.406: v71.12,60.33 IC1.22 | BARO.2 33.55,96.47 36.35,93.66 45.72,93.66 X18.4 | IMU.4 49.36,79.84 52.46,82.94 52.46,84.06 51.34,85.18 GYRO.1 | 67.31,69.85 67.31,75.88 69.85,78.42 X17.4 X14.4 | 67.31,69.85 | 67.31,69.85 v72.63,64.53
SDA  (via drill 0.5)
  Top 0.406: X14.3 X15.3 X16.3 X17.3 67.3,83.43 GYRO.2 48.32,83.43 46.99,84.76 46.99,95 X18.3 | IC1.23 R1.1 | MAG.3 80.18,73.99 v68.58,62.39
  Bottom 0.406: IC1.23 v68.58,62.39 63.34,67.63 50.16,67.63 | BARO.1 36.1,96.61 38.26,94.46 43.91,94.46 X18.3 | GYRO.2 47.47,79.75 IMU.3 47.47,72.39 50.16,69.69 50.16,67.63 | ACCEL.7 50.16,67.63 | ACCEL.7 | 72.39,88.58 X14.3 72.39,96.2
SERVO1
  Top 0.406: SERVO1.1 IC1.4
SERVO2
  Top 0.406: SERVO2.1 IC1.5
TX0-HV  (via drill 0.5)
  Top 0.406: IC1.15 R9.1 | SJ7.1 61.69,13.72 62.07,13.34 69.85,13.34 SJ9.1 70.39,13.72 71.12,14.45 71.12,17.68 70.55,18.26 v61.28,18.26 | v60.96,31.91 60.01,30.96 60.01,25.08 59.69,24.77 v59.69,19.53
  Bottom 0.406: v60.96,31.91 IC1.15 | v59.69,19.53 60.01,19.53 v61.28,18.26
TX0-LV  (via drill 0.5)
  Top 0.406: R9.2 v58.58,30.96 R8.2 | SJ11.1 28.19,5.33 36.67,13.81 43.27,13.81 SJ13.1 44.98,14.99 45.72,15.73 v45.72,20.32
  Bottom 0.406: v45.72,20.32 47.94,20.32 v58.58,30.96
TX1-HV  (via drill 0.5)
  Top 0.406: IC1.17 66.04,36.51 R10.1 64.45,35.24 63.5,34.29 63.5,32.7 60.96,30.16 v60.96,25.4 | SJ7.3 61.59,17.14 v64.14,17.14 69.85,17.14 SJ9.3
  Bottom 0.406: v64.14,17.14 64.14,24.24 62.98,25.4 v60.96,25.4
TX1-LV  (via drill 0.5)
  Top 0.406: R10.2 64.77,32.54 v62.23,30.01 R11.2 | SJ11.3 25.15,6.1 v38.26,19.21 | v44.45,19.21 SJ13.3
  Bottom 0.406: v38.26,19.21 v44.45,19.21 48.26,19.21 59.06,30.01 v62.23,30.01
USBD+
  Top 0.406: R15.2 12.7,68.89 11.11,67.31 8.98,67.31 7.62,65.94 R5.1 13.97,54.61 IC1.3
USBD-  (via drill 0.5)
  Top 0.406: R16.2 11.43,75.89 12.38,74.93 12.38,74.61 R14.2 14.66,74.3 15.56,73.4 15.56,66.99 14.61,66.04 9.76,66.04 8.41,64.69 8.41,62.23 9.21,61.44 v9.21,56.04 | R4.1 v9.21,49.53 16.51,49.53 IC1.2
  Bottom 0.406: v9.21,49.53 v9.21,56.04
USBPWR  (via drill 0.5)
  Top 0.406: 4.8,79.22 4.8,78.36 5.69,77.47 6.95,77.47 | 4.8,79.22 C10.+ 4.76,81.95 SJ18.1 | R16.1 9.47,78.74 9.47,78.69 8.26,77.47 6.95,77.47 | 6.95,77.47 U$5.VBUS | IC1.1 16.83,46.67 13.49,46.67 11.27,44.45 R3.1 v7.62,46.04 | v4.79,79.26 4.8,79.22
  Bottom 0.406: v4.79,79.26 3.17,77.63 3.17,63.66 7.62,59.21 v7.62,46.04

## Text on the board
_tsilk: G | V+ | D | C | C | D | V+ | G | 3V3 | 5V | 5V | 3V3 | V+ | GND | 2 | 3 | 4 | 5 | 6 | 6 | GND | SYS | 3V3 | V-RC | ESC | G | 5V | V+ | V+ | GND | G | 5V | 5V | 16 MHz | GND | 2 | 3 | 4 | ESC | SYS | GND | 3V3 | SER1 | 1 | 5V | SER1 | 3V3 | SER0 | SER0 | G | 0 | SER1 | SER0
_bsilk: 3V3 | 5V